# EAGLE board LilyPad_Reed_Panel_v10 (EAGLE 7.3.0)
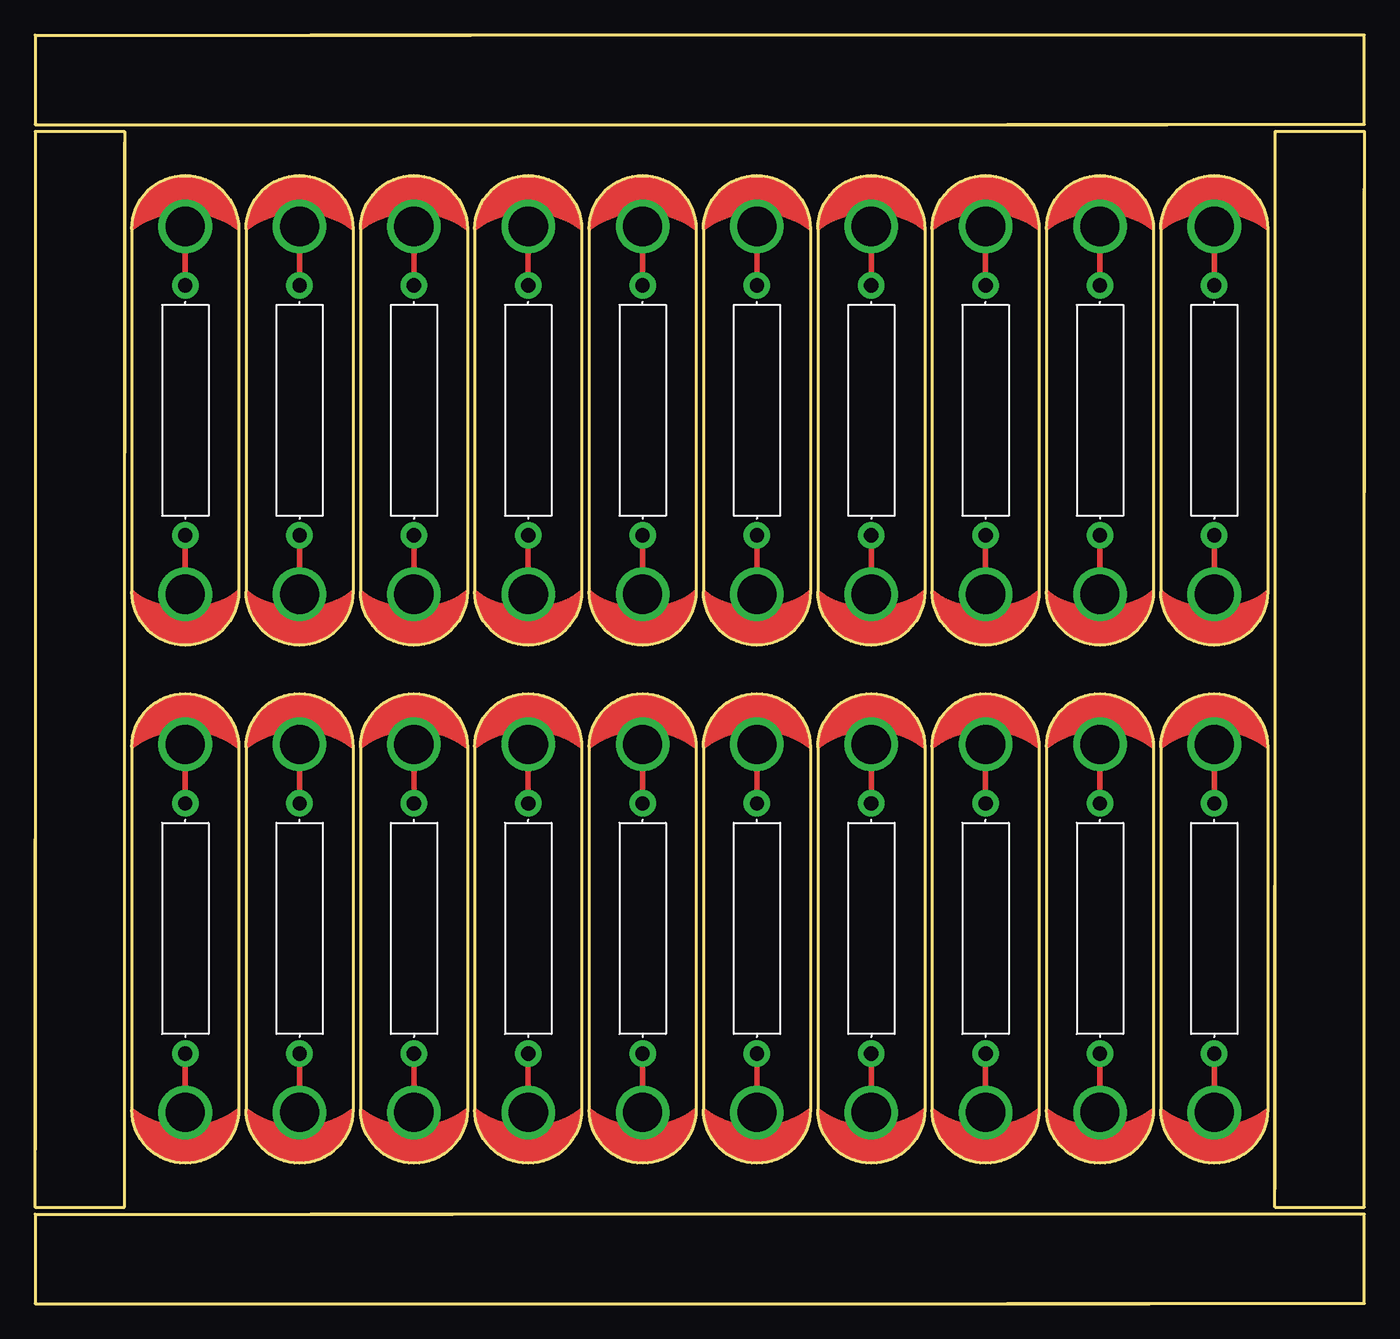
[diagram p0: board, top side]
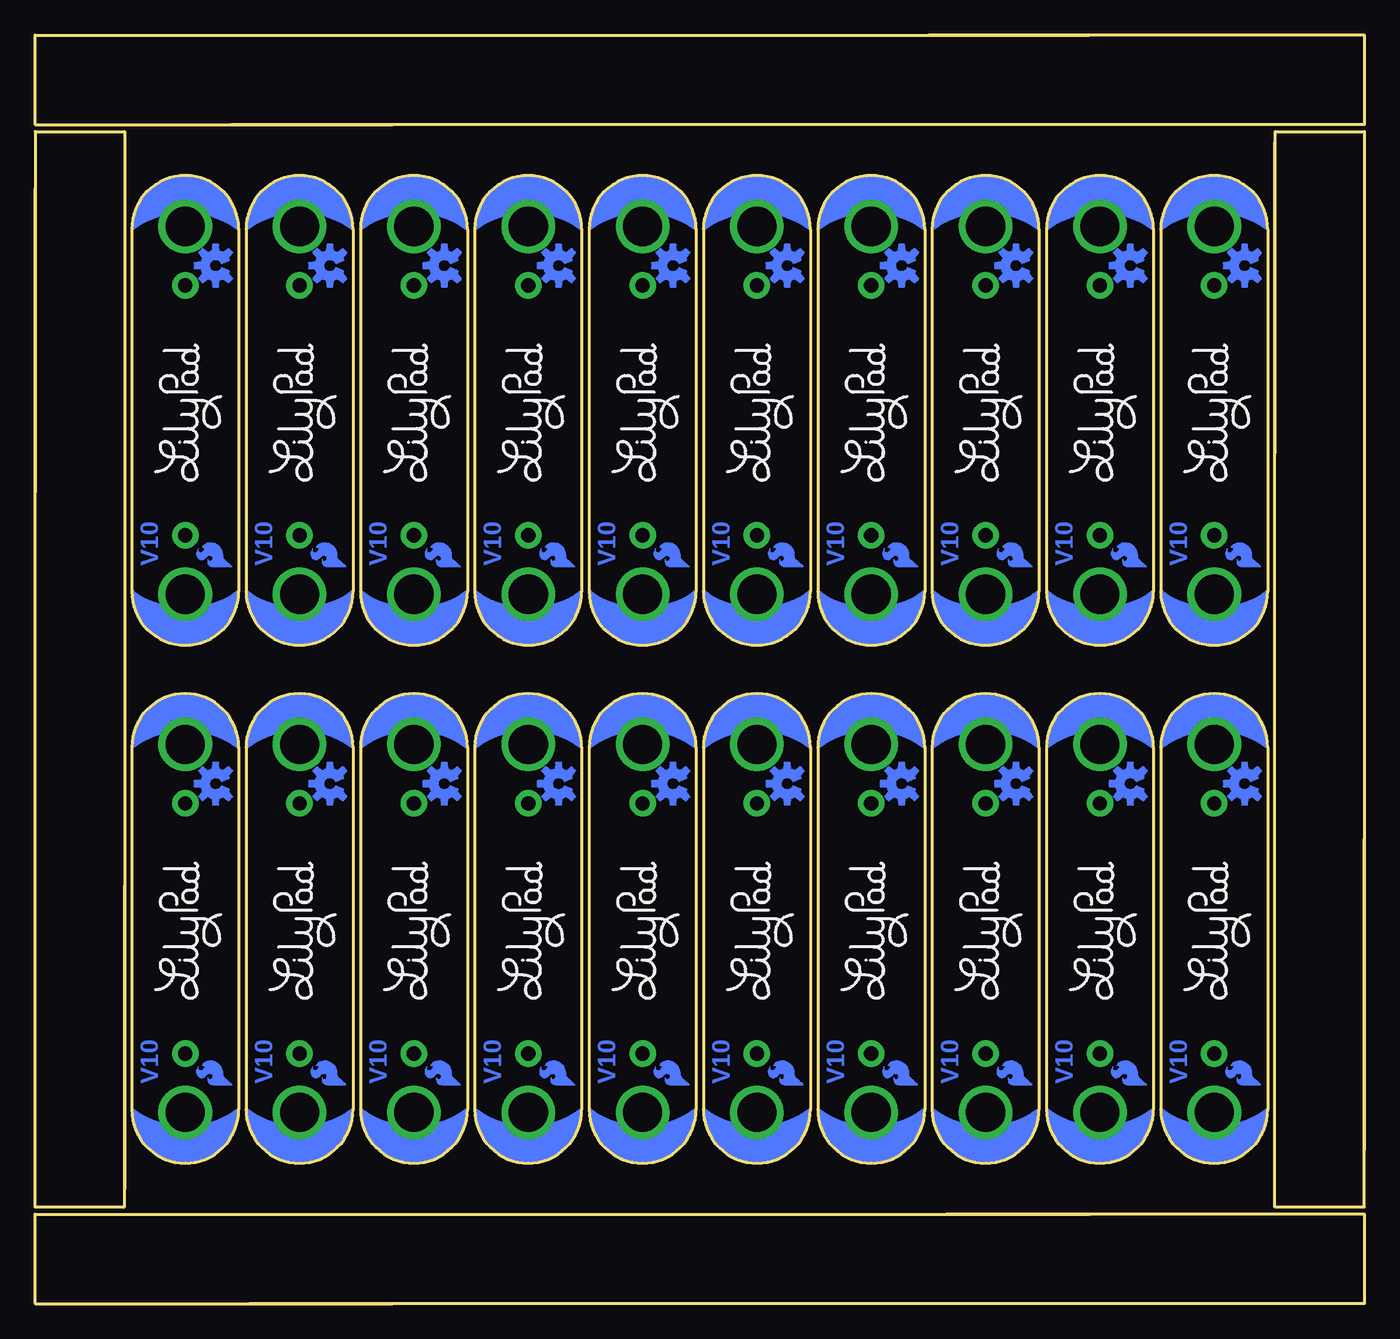
[diagram p1: board, bottom side, seen from below]

Size 94.49 x 90.17 mm. Coordinates in mm from the lower left corner, seen from the top.
Outline: 6.35,82.55 6.35,6.86 0,6.86 0,33.02
Outline: 79.25,0 0,0 0,6.35 29.72,6.35
Outline: 19.56,6.35 94.49,6.35 94.49,0 69.09,0
Outline: 94.49,79.25 94.49,6.86 88.14,6.86 88.14,29.72
Outline: 88.14,8.13 88.14,83.31 94.49,83.31 94.49,57.66
Outline: 19.56,90.17 94.49,90.17 94.49,83.82 69.09,83.82
Outline: 80.52,83.82 0,83.82 0,90.17 30.99,90.17
Outline: 0,10.92 0,83.31 6.35,83.31 6.35,60.45
Outline: 6.87,39.56 arc-180 14.47,39.56 14.47,13.78 arc-180 6.87,13.78 6.87,39.56
Outline: 15,39.56 arc-180 22.6,39.56 22.6,13.78 arc-180 15,13.78 15,39.56
Outline: 23.12,39.56 arc-180 30.72,39.56 30.72,13.78 arc-180 23.12,13.78 23.12,39.56
Outline: 31.25,39.56 arc-180 38.85,39.56 38.85,13.78 arc-180 31.25,13.78 31.25,39.56
Outline: 39.38,39.56 arc-180 46.98,39.56 46.98,13.78 arc-180 39.38,13.78 39.38,39.56
Outline: 47.51,39.56 arc-180 55.11,39.56 55.11,13.78 arc-180 47.51,13.78 47.51,39.56
Outline: 55.64,39.56 arc-180 63.24,39.56 63.24,13.78 arc-180 55.64,13.78 55.64,39.56
Outline: 63.76,39.56 arc-180 71.36,39.56 71.36,13.78 arc-180 63.76,13.78 63.76,39.56
Outline: 71.89,39.56 arc-180 79.49,39.56 79.49,13.78 arc-180 71.89,13.78 71.89,39.56
Outline: 80.02,39.56 arc-180 87.62,39.56 87.62,13.78 arc-180 80.02,13.78 80.02,39.56
Outline: 6.87,76.39 arc-180 14.47,76.39 14.47,50.61 arc-180 6.87,50.61 6.87,76.39
Outline: 15,76.39 arc-180 22.6,76.39 22.6,50.61 arc-180 15,50.61 15,76.39
Outline: 23.12,76.39 arc-180 30.72,76.39 30.72,50.61 arc-180 23.12,50.61 23.12,76.39
Outline: 31.25,76.39 arc-180 38.85,76.39 38.85,50.61 arc-180 31.25,50.61 31.25,76.39
Outline: 39.38,76.39 arc-180 46.98,76.39 46.98,50.61 arc-180 39.38,50.61 39.38,76.39
Outline: 47.51,76.39 arc-180 55.11,76.39 55.11,50.61 arc-180 47.51,50.61 47.51,76.39
Outline: 55.64,76.39 arc-180 63.24,76.39 63.24,50.61 arc-180 55.64,50.61 55.64,76.39
Outline: 63.76,76.39 arc-180 71.36,76.39 71.36,50.61 arc-180 63.76,50.61 63.76,76.39
Outline: 71.89,76.39 arc-180 79.49,76.39 79.49,50.61 arc-180 71.89,50.61 71.89,76.39
Outline: 80.02,76.39 arc-180 87.62,76.39 87.62,50.61 arc-180 80.02,50.61 80.02,76.39
Copper layers (1*16): Top 0.035mm / dielectric 1.5mm / Bottom 0.035mm
Design rules "SparkFun-2-layer": minimum track width 7mil, minimum drill 15mil, track to track 8mil, track to pad 8mil, pad to pad 8mil, via to via 8mil, smd to smd 8mil, copper to edge 8mil, drill to drill 8mil, minimum pad ring 12mil, minimum via ring 10mil, stop-mask expansion 4mil, vias tented up to drill 20mil, thermal gap 10mil

## Footprints (pad centres in the part's own frame; a part is rotated, then mirrored left to right if it is on the bottom)
REED_SWITCH_PLASTIC = drill 1.016 pad 1.88: P$1 -8.89,0; P$2 8.89,0
PETAL-MEDIUM-2SIDE = drill 2.794: 1 0,-0.254

## Placement (x,y rotation side)
LOGO1  OSHW-LOGOS-COPPER  [OSHW-LOGO-S_COPPER]  8.51,36.96 90 bottom
LOGO2  SFE_LOGO_FLAME.1COP  [SFE_LOGO_FLAME_COPPER_.1]  6.99,15.24 90 bottom
LOGO3  OSHW-LOGOS-COPPER  [OSHW-LOGO-S_COPPER]  16.64,36.96 90 bottom
LOGO4  SFE_LOGO_FLAME.1COP  [SFE_LOGO_FLAME_COPPER_.1]  15.11,15.24 90 bottom
LOGO5  OSHW-LOGOS-COPPER  [OSHW-LOGO-S_COPPER]  24.77,36.96 90 bottom
LOGO6  SFE_LOGO_FLAME.1COP  [SFE_LOGO_FLAME_COPPER_.1]  23.24,15.24 90 bottom
LOGO7  OSHW-LOGOS-COPPER  [OSHW-LOGO-S_COPPER]  32.89,36.96 90 bottom
LOGO8  SFE_LOGO_FLAME.1COP  [SFE_LOGO_FLAME_COPPER_.1]  31.37,15.24 90 bottom
LOGO9  OSHW-LOGOS-COPPER  [OSHW-LOGO-S_COPPER]  41.02,36.96 90 bottom
LOGO10  SFE_LOGO_FLAME.1COP  [SFE_LOGO_FLAME_COPPER_.1]  39.5,15.24 90 bottom
LOGO11  OSHW-LOGOS-COPPER  [OSHW-LOGO-S_COPPER]  49.15,36.96 90 bottom
LOGO12  SFE_LOGO_FLAME.1COP  [SFE_LOGO_FLAME_COPPER_.1]  47.62,15.24 90 bottom
LOGO13  OSHW-LOGOS-COPPER  [OSHW-LOGO-S_COPPER]  57.28,36.96 90 bottom
LOGO14  SFE_LOGO_FLAME.1COP  [SFE_LOGO_FLAME_COPPER_.1]  55.75,15.24 90 bottom
LOGO15  OSHW-LOGOS-COPPER  [OSHW-LOGO-S_COPPER]  65.41,36.96 90 bottom
LOGO16  SFE_LOGO_FLAME.1COP  [SFE_LOGO_FLAME_COPPER_.1]  63.88,15.24 90 bottom
LOGO17  OSHW-LOGOS-COPPER  [OSHW-LOGO-S_COPPER]  73.53,36.96 90 bottom
LOGO18  SFE_LOGO_FLAME.1COP  [SFE_LOGO_FLAME_COPPER_.1]  72.01,15.24 90 bottom
LOGO19  OSHW-LOGOS-COPPER  [OSHW-LOGO-S_COPPER]  81.66,36.96 90 bottom
LOGO20  SFE_LOGO_FLAME.1COP  [SFE_LOGO_FLAME_COPPER_.1]  80.14,15.24 90 bottom
LOGO21  OSHW-LOGOS-COPPER  [OSHW-LOGO-S_COPPER]  8.51,73.79 90 bottom
LOGO22  SFE_LOGO_FLAME.1COP  [SFE_LOGO_FLAME_COPPER_.1]  6.99,52.07 90 bottom
LOGO23  OSHW-LOGOS-COPPER  [OSHW-LOGO-S_COPPER]  16.64,73.79 90 bottom
LOGO24  SFE_LOGO_FLAME.1COP  [SFE_LOGO_FLAME_COPPER_.1]  15.11,52.07 90 bottom
LOGO25  OSHW-LOGOS-COPPER  [OSHW-LOGO-S_COPPER]  24.77,73.79 90 bottom
LOGO26  SFE_LOGO_FLAME.1COP  [SFE_LOGO_FLAME_COPPER_.1]  23.24,52.07 90 bottom
LOGO27  OSHW-LOGOS-COPPER  [OSHW-LOGO-S_COPPER]  32.89,73.79 90 bottom
LOGO28  SFE_LOGO_FLAME.1COP  [SFE_LOGO_FLAME_COPPER_.1]  31.37,52.07 90 bottom
LOGO29  OSHW-LOGOS-COPPER  [OSHW-LOGO-S_COPPER]  41.02,73.79 90 bottom
LOGO30  SFE_LOGO_FLAME.1COP  [SFE_LOGO_FLAME_COPPER_.1]  39.5,52.07 90 bottom
LOGO31  OSHW-LOGOS-COPPER  [OSHW-LOGO-S_COPPER]  49.15,73.79 90 bottom
LOGO32  SFE_LOGO_FLAME.1COP  [SFE_LOGO_FLAME_COPPER_.1]  47.62,52.07 90 bottom
LOGO33  OSHW-LOGOS-COPPER  [OSHW-LOGO-S_COPPER]  57.28,73.79 90 bottom
LOGO34  SFE_LOGO_FLAME.1COP  [SFE_LOGO_FLAME_COPPER_.1]  55.75,52.07 90 bottom
LOGO35  OSHW-LOGOS-COPPER  [OSHW-LOGO-S_COPPER]  65.41,73.79 90 bottom
LOGO36  SFE_LOGO_FLAME.1COP  [SFE_LOGO_FLAME_COPPER_.1]  63.88,52.07 90 bottom
LOGO37  OSHW-LOGOS-COPPER  [OSHW-LOGO-S_COPPER]  73.53,73.79 90 bottom
LOGO38  SFE_LOGO_FLAME.1COP  [SFE_LOGO_FLAME_COPPER_.1]  72.01,52.07 90 bottom
LOGO39  OSHW-LOGOS-COPPER  [OSHW-LOGO-S_COPPER]  81.66,73.79 90 bottom
LOGO40  SFE_LOGO_FLAME.1COP  [SFE_LOGO_FLAME_COPPER_.1]  80.14,52.07 90 bottom
S1  REED  [REED_SWITCH_PLASTIC]  10.67,26.67 270 top
S2  REED  [REED_SWITCH_PLASTIC]  18.8,26.67 270 top
S3  REED  [REED_SWITCH_PLASTIC]  26.92,26.67 270 top
S4  REED  [REED_SWITCH_PLASTIC]  35.05,26.67 270 top
S5  REED  [REED_SWITCH_PLASTIC]  43.18,26.67 270 top
S6  REED  [REED_SWITCH_PLASTIC]  51.31,26.67 270 top
S7  REED  [REED_SWITCH_PLASTIC]  59.44,26.67 270 top
S8  REED  [REED_SWITCH_PLASTIC]  67.56,26.67 270 top
S9  REED  [REED_SWITCH_PLASTIC]  75.69,26.67 270 top
S10  REED  [REED_SWITCH_PLASTIC]  83.82,26.67 270 top
S11  REED  [REED_SWITCH_PLASTIC]  10.67,63.5 270 top
S12  REED  [REED_SWITCH_PLASTIC]  18.8,63.5 270 top
S13  REED  [REED_SWITCH_PLASTIC]  26.92,63.5 270 top
S14  REED  [REED_SWITCH_PLASTIC]  35.05,63.5 270 top
S15  REED  [REED_SWITCH_PLASTIC]  43.18,63.5 270 top
S16  REED  [REED_SWITCH_PLASTIC]  51.31,63.5 270 top
S17  REED  [REED_SWITCH_PLASTIC]  59.44,63.5 270 top
S18  REED  [REED_SWITCH_PLASTIC]  67.56,63.5 270 top
S19  REED  [REED_SWITCH_PLASTIC]  75.69,63.5 270 top
S20  REED  [REED_SWITCH_PLASTIC]  83.82,63.5 270 top
SLIDEOFF  SEWTAP8  [PETAL-MEDIUM-2SIDE]  10.67,13.84 0 top
SLIDEOFF1  SEWTAP8  [PETAL-MEDIUM-2SIDE]  18.8,13.84 0 top
SLIDEOFF2  SEWTAP8  [PETAL-MEDIUM-2SIDE]  26.92,13.84 0 top
SLIDEOFF3  SEWTAP8  [PETAL-MEDIUM-2SIDE]  35.05,13.84 0 top
SLIDEOFF4  SEWTAP8  [PETAL-MEDIUM-2SIDE]  43.18,13.84 0 top
SLIDEOFF5  SEWTAP8  [PETAL-MEDIUM-2SIDE]  51.31,13.84 0 top
SLIDEOFF6  SEWTAP8  [PETAL-MEDIUM-2SIDE]  59.44,13.84 0 top
SLIDEOFF7  SEWTAP8  [PETAL-MEDIUM-2SIDE]  67.56,13.84 0 top
SLIDEOFF8  SEWTAP8  [PETAL-MEDIUM-2SIDE]  75.69,13.84 0 top
SLIDEOFF9  SEWTAP8  [PETAL-MEDIUM-2SIDE]  83.82,13.84 0 top
SLIDEOFF10  SEWTAP8  [PETAL-MEDIUM-2SIDE]  10.67,50.67 0 top
SLIDEOFF11  SEWTAP8  [PETAL-MEDIUM-2SIDE]  18.8,50.67 0 top
SLIDEOFF12  SEWTAP8  [PETAL-MEDIUM-2SIDE]  26.92,50.67 0 top
SLIDEOFF13  SEWTAP8  [PETAL-MEDIUM-2SIDE]  35.05,50.67 0 top
SLIDEOFF14  SEWTAP8  [PETAL-MEDIUM-2SIDE]  43.18,50.67 0 top
SLIDEOFF15  SEWTAP8  [PETAL-MEDIUM-2SIDE]  51.31,50.67 0 top
SLIDEOFF16  SEWTAP8  [PETAL-MEDIUM-2SIDE]  59.44,50.67 0 top
SLIDEOFF17  SEWTAP8  [PETAL-MEDIUM-2SIDE]  67.56,50.67 0 top
SLIDEOFF18  SEWTAP8  [PETAL-MEDIUM-2SIDE]  75.69,50.67 0 top
SLIDEOFF19  SEWTAP8  [PETAL-MEDIUM-2SIDE]  83.82,50.67 0 top
SLIDEON  SEWTAP8  [PETAL-MEDIUM-2SIDE]  10.67,39.5 180 top
SLIDEON1  SEWTAP8  [PETAL-MEDIUM-2SIDE]  18.8,39.5 180 top
SLIDEON2  SEWTAP8  [PETAL-MEDIUM-2SIDE]  26.92,39.5 180 top
SLIDEON3  SEWTAP8  [PETAL-MEDIUM-2SIDE]  35.05,39.5 180 top
SLIDEON4  SEWTAP8  [PETAL-MEDIUM-2SIDE]  43.18,39.5 180 top
SLIDEON5  SEWTAP8  [PETAL-MEDIUM-2SIDE]  51.31,39.5 180 top
SLIDEON6  SEWTAP8  [PETAL-MEDIUM-2SIDE]  59.44,39.5 180 top
SLIDEON7  SEWTAP8  [PETAL-MEDIUM-2SIDE]  67.56,39.5 180 top
SLIDEON8  SEWTAP8  [PETAL-MEDIUM-2SIDE]  75.69,39.5 180 top
SLIDEON9  SEWTAP8  [PETAL-MEDIUM-2SIDE]  83.82,39.5 180 top
SLIDEON10  SEWTAP8  [PETAL-MEDIUM-2SIDE]  10.67,76.33 180 top
SLIDEON11  SEWTAP8  [PETAL-MEDIUM-2SIDE]  18.8,76.33 180 top
SLIDEON12  SEWTAP8  [PETAL-MEDIUM-2SIDE]  26.92,76.33 180 top
SLIDEON13  SEWTAP8  [PETAL-MEDIUM-2SIDE]  35.05,76.33 180 top
SLIDEON14  SEWTAP8  [PETAL-MEDIUM-2SIDE]  43.18,76.33 180 top
SLIDEON15  SEWTAP8  [PETAL-MEDIUM-2SIDE]  51.31,76.33 180 top
SLIDEON16  SEWTAP8  [PETAL-MEDIUM-2SIDE]  59.44,76.33 180 top
SLIDEON17  SEWTAP8  [PETAL-MEDIUM-2SIDE]  67.56,76.33 180 top
SLIDEON18  SEWTAP8  [PETAL-MEDIUM-2SIDE]  75.69,76.33 180 top
SLIDEON19  SEWTAP8  [PETAL-MEDIUM-2SIDE]  83.82,76.33 180 top
U$1  LOGO-LPLP  [LOGO-LILYPAD]  10.79,26.54 90 bottom
U$2  LOGO-LPLP  [LOGO-LILYPAD]  18.92,26.54 90 bottom
U$3  LOGO-LPLP  [LOGO-LILYPAD]  27.05,26.54 90 bottom
U$4  LOGO-LPLP  [LOGO-LILYPAD]  35.18,26.54 90 bottom
U$5  LOGO-LPLP  [LOGO-LILYPAD]  43.31,26.54 90 bottom
U$6  LOGO-LPLP  [LOGO-LILYPAD]  51.44,26.54 90 bottom
U$7  LOGO-LPLP  [LOGO-LILYPAD]  59.56,26.54 90 bottom
U$8  LOGO-LPLP  [LOGO-LILYPAD]  67.69,26.54 90 bottom
U$9  LOGO-LPLP  [LOGO-LILYPAD]  75.82,26.54 90 bottom
U$10  LOGO-LPLP  [LOGO-LILYPAD]  83.95,26.54 90 bottom
U$11  LOGO-LPLP  [LOGO-LILYPAD]  10.79,63.37 90 bottom
U$12  LOGO-LPLP  [LOGO-LILYPAD]  18.92,63.37 90 bottom
U$13  LOGO-LPLP  [LOGO-LILYPAD]  27.05,63.37 90 bottom
U$14  LOGO-LPLP  [LOGO-LILYPAD]  35.18,63.37 90 bottom
U$15  LOGO-LPLP  [LOGO-LILYPAD]  43.31,63.37 90 bottom
U$16  LOGO-LPLP  [LOGO-LILYPAD]  51.44,63.37 90 bottom
U$17  LOGO-LPLP  [LOGO-LILYPAD]  59.56,63.37 90 bottom
U$18  LOGO-LPLP  [LOGO-LILYPAD]  67.69,63.37 90 bottom
U$19  LOGO-LPLP  [LOGO-LILYPAD]  75.82,63.37 90 bottom
U$20  LOGO-LPLP  [LOGO-LILYPAD]  83.95,63.37 90 bottom

## Library data of the parts
LOGO1-LOGO40 = SparkFun-Aesthetics
S1-S20 = SparkFun-Electromechanical; PROD_ID: SWCH-10467
SLIDEOFF SLIDEOFF1-SLIDEOFF19 SLIDEON SLIDEON1-SLIDEON19 U$1-U$20 = LilyPad-Wearables

## Nets
N$1: S1.P$2 SLIDEOFF.1
N$2: S1.P$1 SLIDEON.1
N$3: S2.P$2 SLIDEOFF1.1
N$4: S2.P$1 SLIDEON1.1
N$5: S3.P$2 SLIDEOFF2.1
N$6: S3.P$1 SLIDEON2.1
N$7: S4.P$2 SLIDEOFF3.1
N$8: S4.P$1 SLIDEON3.1
N$9: S5.P$2 SLIDEOFF4.1
N$10: S5.P$1 SLIDEON4.1
N$11: S6.P$2 SLIDEOFF5.1
N$12: S6.P$1 SLIDEON5.1
N$13: S7.P$2 SLIDEOFF6.1
N$14: S7.P$1 SLIDEON6.1
N$15: S8.P$2 SLIDEOFF7.1
N$16: S8.P$1 SLIDEON7.1
N$17: S9.P$2 SLIDEOFF8.1
N$18: S9.P$1 SLIDEON8.1
N$19: S10.P$2 SLIDEOFF9.1
N$20: S10.P$1 SLIDEON9.1
N$21: S11.P$2 SLIDEOFF10.1
N$22: S11.P$1 SLIDEON10.1
N$23: S12.P$2 SLIDEOFF11.1
N$24: S12.P$1 SLIDEON11.1
N$25: S13.P$2 SLIDEOFF12.1
N$26: S13.P$1 SLIDEON12.1
N$27: S14.P$2 SLIDEOFF13.1
N$28: S14.P$1 SLIDEON13.1
N$29: S15.P$2 SLIDEOFF14.1
N$30: S15.P$1 SLIDEON14.1
N$31: S16.P$2 SLIDEOFF15.1
N$32: S16.P$1 SLIDEON15.1
N$33: S17.P$2 SLIDEOFF16.1
N$34: S17.P$1 SLIDEON16.1
N$35: S18.P$2 SLIDEOFF17.1
N$36: S18.P$1 SLIDEON17.1
N$37: S19.P$2 SLIDEOFF18.1
N$38: S19.P$1 SLIDEON18.1
N$39: S20.P$2 SLIDEOFF19.1
N$40: S20.P$1 SLIDEON19.1

## Tracks (layer width: path | path; a pad name or v marks a point on that pad's centre or on a via)
N$1
  Top 0.406: SLIDEOFF.1 S1.P$2
N$2
  Top 0.406: SLIDEON.1 S1.P$1
N$3
  Top 0.406: SLIDEOFF1.1 S2.P$2
N$4
  Top 0.406: SLIDEON1.1 S2.P$1
N$5
  Top 0.406: SLIDEOFF2.1 S3.P$2
N$6
  Top 0.406: SLIDEON2.1 S3.P$1
N$7
  Top 0.406: SLIDEOFF3.1 S4.P$2
N$8
  Top 0.406: SLIDEON3.1 S4.P$1
N$9
  Top 0.406: SLIDEOFF4.1 S5.P$2
N$10
  Top 0.406: SLIDEON4.1 S5.P$1
N$11
  Top 0.406: SLIDEOFF5.1 S6.P$2
N$12
  Top 0.406: SLIDEON5.1 S6.P$1
N$13
  Top 0.406: SLIDEOFF6.1 S7.P$2
N$14
  Top 0.406: SLIDEON6.1 S7.P$1
N$15
  Top 0.406: SLIDEOFF7.1 S8.P$2
N$16
  Top 0.406: SLIDEON7.1 S8.P$1
N$17
  Top 0.406: SLIDEOFF8.1 S9.P$2
N$18
  Top 0.406: SLIDEON8.1 S9.P$1
N$19
  Top 0.406: SLIDEOFF9.1 S10.P$2
N$20
  Top 0.406: SLIDEON9.1 S10.P$1
N$21
  Top 0.406: SLIDEOFF10.1 S11.P$2
N$22
  Top 0.406: SLIDEON10.1 S11.P$1
N$23
  Top 0.406: SLIDEOFF11.1 S12.P$2
N$24
  Top 0.406: SLIDEON11.1 S12.P$1
N$25
  Top 0.406: SLIDEOFF12.1 S13.P$2
N$26
  Top 0.406: SLIDEON12.1 S13.P$1
N$27
  Top 0.406: SLIDEOFF13.1 S14.P$2
N$28
  Top 0.406: SLIDEON13.1 S14.P$1
N$29
  Top 0.406: SLIDEOFF14.1 S15.P$2
N$30
  Top 0.406: SLIDEON14.1 S15.P$1
N$31
  Top 0.406: SLIDEOFF15.1 S16.P$2
N$32
  Top 0.406: SLIDEON15.1 S16.P$1
N$33
  Top 0.406: SLIDEOFF16.1 S17.P$2
N$34
  Top 0.406: SLIDEON16.1 S17.P$1
N$35
  Top 0.406: SLIDEOFF17.1 S18.P$2
N$36
  Top 0.406: SLIDEON17.1 S18.P$1
N$37
  Top 0.406: SLIDEOFF18.1 S19.P$2
N$38
  Top 0.406: SLIDEON18.1 S19.P$1
N$39
  Top 0.406: SLIDEOFF19.1 S20.P$2
N$40
  Top 0.406: SLIDEON19.1 S20.P$1

## Text on the board
Bottom: V10 | V10 | V10 | V10 | V10 | V10 | V10 | V10 | V10 | V10 | V10 | V10 | V10 | V10 | V10 | V10 | V10 | V10 | V10 | V10
bDocu: purple 0.08mm